# Altium PCB PCB1.PcbDoc (part 2 of 2)
Units mm, origin at the board's own origin, x right, y up, seen from the top; angles counter-clockwise.
Board outline 100.58 x 99.31 mm, 2 copper layers (Top Layer, Bottom Layer); 150 components, 13 nets, 389 pads, 0 vias.
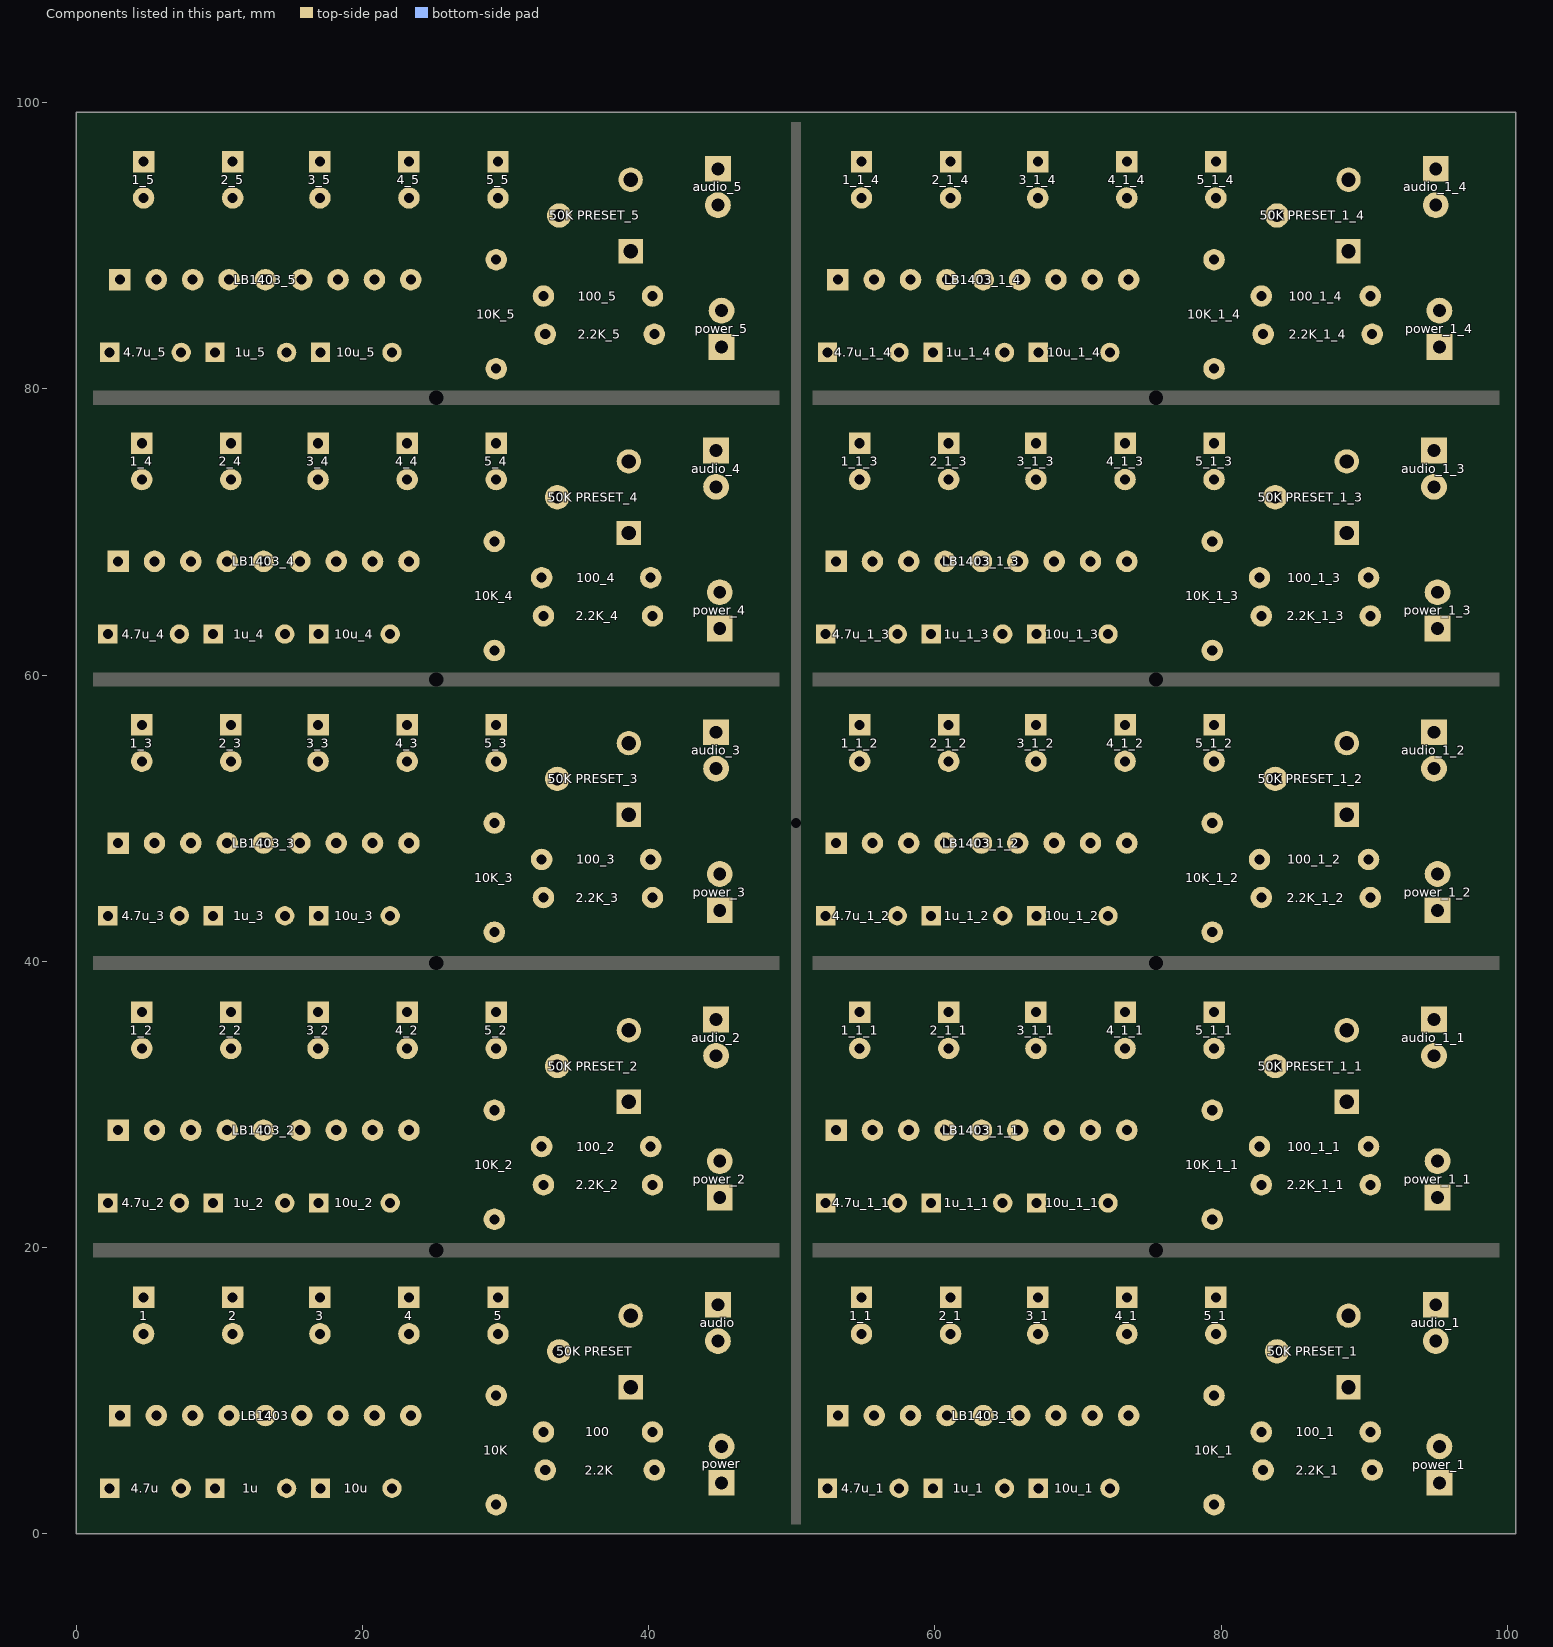
[diagram p2: the components of this part, seen from the top]

## Nets (pads, with @x,y where several pads share a name; then routed paths per layer and width w, separated by ;. In a path a pad name is that pad's centre, name@x,y a point inside that pad or via, vN(x,y) a via of type N, cw(c..) or ccw(c..) an arc to the next point about the centre after c; other vN are vias at no path point) (continued)
copper on no net: | length 3366.2
  Top Layer w0.508: 2.921,28.194 4.572,29.845 4.572,33.909 ; 2.921,48.26 4.572,49.911 4.572,53.975 ; 2.921,67.945 4.572,69.596 4.572,73.66 ; 3.048,87.63 4.699,89.281 4.699,93.345 ; 5.461,28.194 9.627,32.36 9.627,32.741 10.795,33.909 ; 5.461,48.26 9.627,52.426 9.627,52.807 10.795,53.975 ; 5.461,67.945 9.627,72.111 9.627,72.492 10.795,73.66 ; 5.588,87.63 9.754,91.796 9.754,92.177 10.922,93.345 ; 16.891,36.449 18.161,35.179 18.161,30.734 16.891,29.464 16.891,23.154 16.931,23.114 ; 16.891,56.515 18.161,55.245 18.161,50.8 16.891,49.53 16.891,43.22 16.931,43.18 ; 16.891,76.2 18.161,74.93 18.161,70.485 16.891,69.215 16.891,62.905 16.931,62.865 ; 17.018,95.885 18.288,94.615 18.288,90.17 17.018,88.9 17.018,82.59 17.058,82.55 ; 21.931,23.114 23.074,21.971 29.21,21.971 32.385,21.971 38.608,28.194 38.608,30.179 41.83,33.401 44.704,33.401 44.958,33.147 44.958,26.035 ; 21.931,43.18 23.074,42.037 29.21,42.037 32.385,42.037 38.608,48.26 38.608,50.245 41.83,53.467 44.704,53.467 44.958,53.213 44.958,46.101 ; 21.931,62.865 23.074,61.722 29.21,61.722 32.385,61.722 38.608,67.945 38.608,69.93 41.83,73.152 44.704,73.152 44.958,72.898 44.958,65.786 ; 22.058,82.55 23.201,81.407 29.337,81.407 32.512,81.407 38.735,87.63 38.735,89.615 41.957,92.837 44.831,92.837 45.085,92.583 45.085,85.471 ; 23.114,36.449 21.742,35.077 21.742,29.693 23.241,28.194 ; 23.114,56.515 21.742,55.143 21.742,49.759 23.241,48.26 ; 23.114,76.2 21.742,74.828 21.742,69.444 23.241,67.945 ; 23.241,95.885 21.869,94.513 21.869,89.129 23.368,87.63 ; 32.639,24.384 36.957,28.702 36.957,33.528 38.608,35.179 ; 32.639,44.45 36.957,48.768 36.957,53.594 38.608,55.245 ; 32.639,64.135 36.957,68.453 36.957,73.279 38.608,74.93 ; 32.766,83.82 37.084,88.138 37.084,92.964 38.735,94.615 ; 53.086,28.194 54.737,29.845 54.737,33.909 ; 53.086,48.26 54.737,49.911 54.737,53.975 ; 53.086,67.945 54.737,69.596 54.737,73.66 ; 53.213,8.255 54.864,9.906 54.864,13.97 ; 53.213,87.63 54.864,89.281 54.864,93.345 ; 55.626,28.194 59.792,32.36 59.792,32.741 60.96,33.909 ; 55.626,48.26 59.792,52.426 59.792,52.807 60.96,53.975 ; 55.626,67.945 59.792,72.111 59.792,72.492 60.96,73.66 ; 55.753,8.255 59.919,12.421 59.919,12.802 61.087,13.97 ; 55.753,87.63 59.919,91.796 59.919,92.177 61.087,93.345 ; 67.056,36.449 68.326,35.179 68.326,30.734 67.056,29.464 67.056,23.154 67.096,23.114 ; 67.056,56.515 68.326,55.245 68.326,50.8 67.056,49.53 67.056,43.22 67.096,43.18 ; 67.056,76.2 68.326,74.93 68.326,70.485 67.056,69.215 67.056,62.905 67.096,62.865 ; 67.183,16.51 68.453,15.24 68.453,10.795 67.183,9.525 67.183,3.215 67.223,3.175 ; 67.183,95.885 68.453,94.615 68.453,90.17 67.183,88.9 67.183,82.59 67.223,82.55 ; 72.096,23.114 73.239,21.971 79.375,21.971 82.55,21.971 88.773,28.194 88.773,30.179 91.995,33.401 94.869,33.401 95.123,33.147 95.123,26.035 ; 72.096,43.18 73.239,42.037 79.375,42.037 82.55,42.037 88.773,48.26 88.773,50.245 91.995,53.467 94.869,53.467 95.123,53.213 95.123,46.101 ; 72.096,62.865 73.239,61.722 79.375,61.722 82.55,61.722 88.773,67.945 88.773,69.93 91.995,73.152 94.869,73.152 95.123,72.898 95.123,65.786 ; 72.223,3.175 73.366,2.032 79.502,2.032 82.677,2.032 88.9,8.255 88.9,10.24 92.122,13.462 94.996,13.462 95.25,13.208 95.25,6.096 ; 72.223,82.55 73.366,81.407 79.502,81.407 82.677,81.407 88.9,87.63 88.9,89.615 92.122,92.837 94.996,92.837 95.25,92.583 95.25,85.471 ; 73.279,36.449 71.907,35.077 71.907,29.693 73.406,28.194 ; 73.279,56.515 71.907,55.143 71.907,49.759 73.406,48.26 ; 73.279,76.2 71.907,74.828 71.907,69.444 73.406,67.945 ; 73.406,16.51 72.034,15.138 72.034,9.754 73.533,8.255 ; 73.406,95.885 72.034,94.513 72.034,89.129 73.533,87.63 ; 82.804,24.384 87.122,28.702 87.122,33.528 88.773,35.179 ; 82.804,44.45 87.122,48.768 87.122,53.594 88.773,55.245 ; 82.804,64.135 87.122,68.453 87.122,73.279 88.773,74.93 ; 82.931,4.445 87.249,8.763 87.249,13.589 88.9,15.24 ; 82.931,83.82 87.249,88.138 87.249,92.964 88.9,94.615
  Bottom Layer w0.508: 2.199,23.114 4.714,25.629 10.287,25.629 11.811,27.153 11.811,28.956 12.319,29.464 16.891,29.464 18.161,28.194 18.64,28.673 18.64,29.156 20.46,30.976 27.825,30.976 29.21,29.591 ; 2.199,43.18 4.714,45.695 10.287,45.695 11.811,47.219 11.811,49.022 12.319,49.53 16.891,49.53 18.161,48.26 18.64,48.739 18.64,49.222 20.46,51.042 27.825,51.042 29.21,49.657 ; 2.199,62.865 4.714,65.38 10.287,65.38 11.811,66.904 11.811,68.707 12.319,69.215 16.891,69.215 18.161,67.945 18.64,68.424 18.64,68.907 20.46,70.727 27.825,70.727 29.21,69.342 ; 2.326,82.55 4.841,85.065 10.414,85.065 11.938,86.589 11.938,88.392 12.446,88.9 17.018,88.9 18.288,87.63 18.767,88.109 18.767,88.592 20.587,90.412 27.952,90.412 29.337,89.027 ; 4.572,36.449 10.795,36.449 16.891,36.449 23.114,36.449 29.337,36.449 ; 4.572,56.515 10.795,56.515 16.891,56.515 23.114,56.515 29.337,56.515 ; 4.572,76.2 10.795,76.2 16.891,76.2 23.114,76.2 29.337,76.2 ; 4.699,95.885 10.922,95.885 17.018,95.885 23.241,95.885 29.464,95.885 ; 7.199,23.114 9.231,21.082 28.321,21.082 29.21,21.971 ; 7.199,43.18 9.231,41.148 28.321,41.148 29.21,42.037 ; 7.199,62.865 9.231,60.833 28.321,60.833 29.21,61.722 ; 7.326,82.55 9.358,80.518 28.448,80.518 29.337,81.407 ; 8.001,28.194 13.716,33.909 16.891,33.909 ; 8.001,48.26 13.716,53.975 16.891,53.975 ; 8.001,67.945 13.716,73.66 16.891,73.66 ; 8.128,87.63 13.843,93.345 17.018,93.345 ; 9.565,23.114 11.191,24.74 30.707,24.74 31.343,24.104 31.343,23.394 32.131,22.606 38.481,22.606 40.259,24.384 ; 9.565,43.18 11.191,44.806 30.707,44.806 31.343,44.17 31.343,43.46 32.131,42.672 38.481,42.672 40.259,44.45 ; 9.565,62.865 11.191,64.491 30.707,64.491 31.343,63.855 31.343,63.145 32.131,62.357 38.481,62.357 40.259,64.135 ; 9.692,82.55 11.318,84.176 30.834,84.176 31.47,83.54 31.47,82.83 32.258,82.042 38.608,82.042 40.386,83.82 ; 10.541,28.194 10.541,29.337 11.557,30.353 17.78,30.353 21.336,33.909 23.114,33.909 ; 10.541,48.26 10.541,49.403 11.557,50.419 17.78,50.419 21.336,53.975 23.114,53.975 ; 10.541,67.945 10.541,69.088 11.557,70.104 17.78,70.104 21.336,73.66 23.114,73.66 ; 10.668,87.63 10.668,88.773 11.684,89.789 17.907,89.789 21.463,93.345 23.241,93.345 ; 13.081,28.194 15.494,25.781 33.68,25.781 36.5,28.6 42.393,28.6 44.958,26.035 ; 13.081,48.26 15.494,45.847 33.68,45.847 36.5,48.666 42.393,48.666 44.958,46.101 ; 13.081,67.945 15.494,65.532 33.68,65.532 36.5,68.351 42.393,68.351 44.958,65.786 ; 13.208,87.63 15.621,85.217 33.807,85.217 36.627,88.036 42.52,88.036 45.085,85.471 ; 14.565,23.114 15.759,21.92 24.232,21.92 25.679,23.368 29.921,23.368 30.48,22.809 30.48,21.717 30.988,21.209 47.371,21.209 47.371,33.274 44.704,35.941 ; 14.565,43.18 15.759,41.986 24.232,41.986 25.679,43.434 29.921,43.434 30.48,42.875 30.48,41.783 30.988,41.275 47.371,41.275 47.371,53.34 44.704,56.007 ; 14.565,62.865 15.759,61.671 24.232,61.671 25.679,63.119 29.921,63.119 30.48,62.56 30.48,61.468 30.988,60.96 47.371,60.96 47.371,73.025 44.704,75.692 ; 14.692,82.55 15.886,81.356 24.359,81.356 25.806,82.804 30.048,82.804 30.607,82.245 30.607,81.153 31.115,80.645 47.498,80.645 47.498,92.71 44.831,95.377 ; 15.621,28.194 17.018,26.797 18.935,26.797 19.443,27.305 19.443,28.715 20.942,30.214 26.171,30.214 28.052,28.333 29.731,28.333 30.468,29.07 30.468,30.112 30.429,30.151 30.429,32.817 29.337,33.909 ; 15.621,48.26 17.018,46.863 18.935,46.863 19.443,47.371 19.443,48.781 20.942,50.28 26.171,50.28 28.052,48.399 29.731,48.399 30.468,49.136 30.468,50.178 30.429,50.217 30.429,52.883 29.337,53.975 ; 15.621,67.945 17.018,66.548 18.935,66.548 19.443,67.056 19.443,68.466 20.942,69.965 26.171,69.965 28.052,68.084 29.731,68.084 30.468,68.821 30.468,69.863 30.429,69.902 30.429,72.568 29.337,73.66 ; 15.748,87.63 17.145,86.233 19.062,86.233 19.57,86.741 19.57,88.151 21.069,89.65 26.298,89.65 28.179,87.769 29.858,87.769 30.595,88.506 30.595,89.548 30.556,89.587 30.556,92.253 29.464,93.345 ; 20.701,28.194 21.959,29.452 25.409,29.452 27.29,27.571 30.047,27.571 30.097,27.621 30.876,27.621 33.608,30.353 33.608,32.679 ; 20.701,48.26 21.959,49.518 25.409,49.518 27.29,47.637 30.047,47.637 30.097,47.687 30.876,47.687 33.608,50.419 33.608,52.745 ; 20.701,67.945 21.959,69.203 25.409,69.203 27.29,67.322 30.047,67.322 30.097,67.372 30.876,67.372 33.608,70.104 33.608,72.43 ; 20.828,87.63 22.086,88.888 25.536,88.888 27.417,87.007 30.174,87.007 30.224,87.057 31.003,87.057 33.735,89.789 33.735,92.115 ; 23.241,28.194 24.626,26.809 30.362,26.809 30.412,26.859 31.865,26.859 31.865,27.051 32.512,27.051 ; 23.241,48.26 24.626,46.875 30.362,46.875 30.412,46.925 31.865,46.925 31.865,47.117 32.512,47.117 ; 23.241,67.945 24.626,66.56 30.362,66.56 30.412,66.61 31.865,66.61 31.865,66.802 32.512,66.802 ; 23.368,87.63 24.753,86.245 30.489,86.245 30.539,86.295 31.992,86.295 31.992,86.487 32.639,86.487 ; 40.132,27.051 43.688,23.495 44.958,23.495 ; 40.132,47.117 43.688,43.561 44.958,43.561 ; 40.132,66.802 43.688,63.246 44.958,63.246 ; 40.259,86.487 43.815,82.931 45.085,82.931 ; 52.364,23.114 54.879,25.629 60.452,25.629 61.976,27.153 61.976,28.956 62.484,29.464 67.056,29.464 68.326,28.194 68.805,28.673 68.805,29.156 70.625,30.976 77.99,30.976 79.375,29.591 ; 52.364,43.18 54.879,45.695 60.452,45.695 61.976,47.219 61.976,49.022 62.484,49.53 67.056,49.53 68.326,48.26 68.805,48.739 68.805,49.222 70.625,51.042 77.99,51.042 79.375,49.657 ; 52.364,62.865 54.879,65.38 60.452,65.38 61.976,66.904 61.976,68.707 62.484,69.215 67.056,69.215 68.326,67.945 68.805,68.424 68.805,68.907 70.625,70.727 77.99,70.727 79.375,69.342 ; 52.491,3.175 55.006,5.69 60.579,5.69 62.103,7.214 62.103,9.017 62.611,9.525 67.183,9.525 68.453,8.255 68.932,8.734 68.932,9.217 70.752,11.037 78.117,11.037 79.502,9.652 ; 52.491,82.55 55.006,85.065 60.579,85.065 62.103,86.589 62.103,88.392 62.611,88.9 67.183,88.9 68.453,87.63 68.932,88.109 68.932,88.592 70.752,90.412 78.117,90.412 79.502,89.027 ; 54.737,36.449 60.96,36.449 67.056,36.449 73.279,36.449 79.502,36.449 ; 54.737,56.515 60.96,56.515 67.056,56.515 73.279,56.515 79.502,56.515 ; 54.737,76.2 60.96,76.2 67.056,76.2 73.279,76.2 79.502,76.2 ; 54.864,16.51 61.087,16.51 67.183,16.51 73.406,16.51 79.629,16.51 ; 54.864,95.885 61.087,95.885 67.183,95.885 73.406,95.885 79.629,95.885 ; 57.364,23.114 59.396,21.082 78.486,21.082 79.375,21.971 ; 57.364,43.18 59.396,41.148 78.486,41.148 79.375,42.037 ; 57.364,62.865 59.396,60.833 78.486,60.833 79.375,61.722 ; 57.491,3.175 59.523,1.143 78.613,1.143 79.502,2.032 ; 57.491,82.55 59.523,80.518 78.613,80.518 79.502,81.407 ; 58.166,28.194 63.881,33.909 67.056,33.909 ; 58.166,48.26 63.881,53.975 67.056,53.975 ; 58.166,67.945 63.881,73.66 67.056,73.66 ; 58.293,8.255 64.008,13.97 67.183,13.97 ; 58.293,87.63 64.008,93.345 67.183,93.345 ; 59.73,23.114 61.356,24.74 80.872,24.74 81.508,24.104 81.508,23.394 82.296,22.606 88.646,22.606 90.424,24.384 ; 59.73,43.18 61.356,44.806 80.872,44.806 81.508,44.17 81.508,43.46 82.296,42.672 88.646,42.672 90.424,44.45 ; 59.73,62.865 61.356,64.491 80.872,64.491 81.508,63.855 81.508,63.145 82.296,62.357 88.646,62.357 90.424,64.135 ; 59.857,3.175 61.483,4.801 80.999,4.801 81.635,4.165 81.635,3.455 82.423,2.667 88.773,2.667 90.551,4.445 ; 59.857,82.55 61.483,84.176 80.999,84.176 81.635,83.54 81.635,82.83 82.423,82.042 88.773,82.042 90.551,83.82 ; 60.706,28.194 60.706,29.337 61.722,30.353 67.945,30.353 71.501,33.909 73.279,33.909 ; 60.706,48.26 60.706,49.403 61.722,50.419 67.945,50.419 71.501,53.975 73.279,53.975 ; 60.706,67.945 60.706,69.088 61.722,70.104 67.945,70.104 71.501,73.66 73.279,73.66 ; 60.833,8.255 60.833,9.398 61.849,10.414 68.072,10.414 71.628,13.97 73.406,13.97 ; 60.833,87.63 60.833,88.773 61.849,89.789 68.072,89.789 71.628,93.345 73.406,93.345 ; 63.246,28.194 65.659,25.781 83.845,25.781 86.665,28.6 92.558,28.6 95.123,26.035 ; 63.246,48.26 65.659,45.847 83.845,45.847 86.665,48.666 92.558,48.666 95.123,46.101 ; 63.246,67.945 65.659,65.532 83.845,65.532 86.665,68.351 92.558,68.351 95.123,65.786 ; 63.373,8.255 65.786,5.842 83.972,5.842 86.792,8.661 92.685,8.661 95.25,6.096 ; 63.373,87.63 65.786,85.217 83.972,85.217 86.792,88.036 92.685,88.036 95.25,85.471 ; 64.73,23.114 65.924,21.92 74.397,21.92 75.844,23.368 80.086,23.368 80.645,22.809 80.645,21.717 81.153,21.209 97.536,21.209 97.536,33.274 94.869,35.941 ; 64.73,43.18 65.924,41.986 74.397,41.986 75.844,43.434 80.086,43.434 80.645,42.875 80.645,41.783 81.153,41.275 97.536,41.275 97.536,53.34 94.869,56.007 ; 64.73,62.865 65.924,61.671 74.397,61.671 75.844,63.119 80.086,63.119 80.645,62.56 80.645,61.468 81.153,60.96 97.536,60.96 97.536,73.025 94.869,75.692 ; 64.857,3.175 66.051,1.981 74.524,1.981 75.971,3.429 80.213,3.429 80.772,2.87 80.772,1.778 81.28,1.27 97.663,1.27 97.663,13.335 94.996,16.002 ; 64.857,82.55 66.051,81.356 74.524,81.356 75.971,82.804 80.213,82.804 80.772,82.245 80.772,81.153 81.28,80.645 97.663,80.645 97.663,92.71 94.996,95.377 ; 65.786,28.194 67.183,26.797 69.1,26.797 69.608,27.305 69.608,28.715 71.107,30.214 76.336,30.214 78.217,28.333 79.896,28.333 80.633,29.07 80.633,30.112 80.594,30.151 80.594,32.817 79.502,33.909 ; 65.786,48.26 67.183,46.863 69.1,46.863 69.608,47.371 69.608,48.781 71.107,50.28 76.336,50.28 78.217,48.399 79.896,48.399 80.633,49.136 80.633,50.178 80.594,50.217 80.594,52.883 79.502,53.975 ; 65.786,67.945 67.183,66.548 69.1,66.548 69.608,67.056 69.608,68.466 71.107,69.965 76.336,69.965 78.217,68.084 79.896,68.084 80.633,68.821 80.633,69.863 80.594,69.902 80.594,72.568 79.502,73.66 ; 65.913,8.255 67.31,6.858 69.227,6.858 69.735,7.366 69.735,8.776 71.234,10.275 76.463,10.275 78.344,8.394 80.023,8.394 80.76,9.131 80.76,10.173 80.721,10.212 80.721,12.878 79.629,13.97 ; 65.913,87.63 67.31,86.233 69.227,86.233 69.735,86.741 69.735,88.151 71.234,89.65 76.463,89.65 78.344,87.769 80.023,87.769 80.76,88.506 80.76,89.548 80.721,89.587 80.721,92.253 79.629,93.345 ; 70.866,28.194 72.124,29.452 75.574,29.452 77.455,27.571 80.212,27.571 80.262,27.621 81.041,27.621 83.773,30.353 83.773,32.679 ; 70.866,48.26 72.124,49.518 75.574,49.518 77.455,47.637 80.212,47.637 80.262,47.687 81.041,47.687 83.773,50.419 83.773,52.745 ; 70.866,67.945 72.124,69.203 75.574,69.203 77.455,67.322 80.212,67.322 80.262,67.372 81.041,67.372 83.773,70.104 83.773,72.43 ; 70.993,8.255 72.251,9.513 75.701,9.513 77.582,7.632 80.339,7.632 80.389,7.682 81.168,7.682 83.9,10.414 83.9,12.74 ; 70.993,87.63 72.251,88.888 75.701,88.888 77.582,87.007 80.339,87.007 80.389,87.057 81.168,87.057 83.9,89.789 83.9,92.115 ; 73.406,28.194 74.791,26.809 80.527,26.809 80.577,26.859 82.03,26.859 82.03,27.051 82.677,27.051 ; 73.406,48.26 74.791,46.875 80.527,46.875 80.577,46.925 82.03,46.925 82.03,47.117 82.677,47.117 ; 73.406,67.945 74.791,66.56 80.527,66.56 80.577,66.61 82.03,66.61 82.03,66.802 82.677,66.802 ; 73.533,8.255 74.918,6.87 80.654,6.87 80.704,6.92 82.157,6.92 82.157,7.112 82.804,7.112 ; 73.533,87.63 74.918,86.245 80.654,86.245 80.704,86.295 82.157,86.295 82.157,86.487 82.804,86.487 ; 90.297,27.051 93.853,23.495 95.123,23.495 ; 90.297,47.117 93.853,43.561 95.123,43.561 ; 90.297,66.802 93.853,63.246 95.123,63.246 ; 90.424,7.112 93.98,3.556 95.25,3.556 ; 90.424,86.487 93.98,82.931 95.25,82.931

## Keep-outs
Keep-Out Layer:
  the board outline again, w0.254

## Silkscreen, mask and mechanical layers (free items; w line width, h text height)
Top Overlay:
  lines w0.254: 2.794,31.242 1.016,29.464 ; 2.794,51.308 1.016,49.53 ; 2.794,70.993 1.016,69.215 ; 2.921,11.303 1.143,9.525 ; 2.921,90.678 1.143,88.9 ; 52.959,31.242 51.181,29.464 ; 52.959,51.308 51.181,49.53 ; 52.959,70.993 51.181,69.215 ; 53.086,11.303 51.308,9.525 ; 53.086,90.678 51.308,88.9 ; 1.016,29.464 1.016,25.781 25.019,25.781 25.019,31.115 25.019,31.623 24.765,31.623 3.175,31.623 1.016,29.464 ; 1.016,49.53 1.016,45.847 25.019,45.847 25.019,51.181 25.019,51.689 24.765,51.689 3.175,51.689 1.016,49.53 ; 1.016,69.215 1.016,65.532 25.019,65.532 25.019,70.866 25.019,71.374 24.765,71.374 3.175,71.374 1.016,69.215 ; 1.143,9.525 3.302,11.684 24.892,11.684 25.146,11.684 25.146,11.176 25.146,5.842 1.143,5.842 1.143,9.525 ; 1.143,88.9 1.143,85.217 25.146,85.217 25.146,90.551 25.146,91.059 24.892,91.059 3.302,91.059 1.143,88.9 ; 51.181,29.464 53.34,31.623 74.93,31.623 75.184,31.623 75.184,31.115 75.184,25.781 51.181,25.781 51.181,29.464 ; 51.181,49.53 53.34,51.689 74.93,51.689 75.184,51.689 75.184,51.181 75.184,45.847 51.181,45.847 51.181,49.53 ; 51.181,69.215 53.34,71.374 74.93,71.374 75.184,71.374 75.184,70.866 75.184,65.532 51.181,65.532 51.181,69.215 ; 51.308,9.525 51.308,5.842 75.311,5.842 75.311,11.176 75.311,11.684 75.057,11.684 53.467,11.684 51.308,9.525 ; 51.308,88.9 53.467,91.059 75.057,91.059 75.311,91.059 75.311,90.551 75.311,85.217 51.308,85.217 51.308,88.9 ; 0.508,20.574 0.508,38.989 49.657,38.989 49.657,20.574 0.508,20.574 ; 0.508,40.64 0.508,59.055 49.657,59.055 49.657,40.64 0.508,40.64 ; 0.508,60.325 0.508,78.74 49.657,78.74 49.657,60.325 0.508,60.325 ; 0.635,0.635 49.784,0.635 49.784,19.05 0.635,19.05 0.635,0.635 ; 0.635,80.01 0.635,98.425 49.784,98.425 49.784,80.01 0.635,80.01 ; 50.673,20.574 99.822,20.574 99.822,38.989 50.673,38.989 50.673,20.574 ; 50.673,40.64 99.822,40.64 99.822,59.055 50.673,59.055 50.673,40.64 ; 50.673,60.325 99.822,60.325 99.822,78.74 50.673,78.74 50.673,60.325 ; 50.8,0.635 50.8,19.05 99.949,19.05 99.949,0.635 50.8,0.635 ; 50.8,80.01 99.949,80.01 99.949,98.425 50.8,98.425 50.8,80.01
  text "AUDIO" at 46.863,97.663 h1.52 r270
  text "AUDIO" at 97.028,97.663 h1.52 r270
  text "SIGNAL" at 41.656,97.028 h0.8
  text "SIGNAL" at 91.821,97.028 h0.8
  text "AI PCB" at 32.385,96.266 h1.52
  text "AI PCB" at 82.55,96.266 h1.52
  text "+" at 2.794,94.996 h1
  text "+" at 9.017,94.996 h1
  text "+" at 15.113,94.996 h1
  text "+" at 21.336,94.996 h1
  text "+" at 27.559,94.996 h1
  text "+" at 52.959,94.996 h1
  text "+" at 59.182,94.996 h1
  text "+" at 65.278,94.996 h1
  text "+" at 71.501,94.996 h1
  text "+" at 77.724,94.996 h1
  text "-" at 2.921,92.837 h1
  text "-" at 9.144,92.837 h1
  text "-" at 15.24,92.837 h1
  text "-" at 21.463,92.837 h1
  text "-" at 27.686,92.837 h1
  text "-" at 53.086,92.837 h1
  text "-" at 59.309,92.837 h1
  text "-" at 65.405,92.837 h1
  text "-" at 71.628,92.837 h1
  text "-" at 77.851,92.837 h1
  text "50K" at 35.052,91.313 h1.5
  text "50K" at 85.217,91.313 h1.5
  text "GND" at 42.672,90.17 h1
  text "GND" at 92.837,90.17 h1
  text "LB1403" at 8.255,89.408 h1.2
  text "LB1403" at 58.42,89.408 h1.2
  text "POWER" at 47.117,88.011 h1.52 r270
  text "POWER" at 97.282,88.011 h1.52 r270
  text "12V" at 42.926,87.122 h1.52
  text "12V" at 92.964,87.122 h1.52
  text "10K" at 28.829,86.614 h1 r270
  text "10K" at 78.994,86.614 h1 r270
  text "100" at 35.179,85.979 h1
  text "100" at 85.344,85.979 h1
  text "-" at 42.418,85.344 h1
  text "-" at 92.583,85.344 h1
  text "2.2K" at 34.925,83.312 h1
  text "2.2K" at 85.09,83.312 h1
  text "+" at 42.545,82.677 h1
  text "+" at 92.71,82.677 h1
  text "4.7u" at 3.175,82.169 h0.9
  text "4.7u" at 53.34,82.169 h0.9
  text "1u" at 11.557,82.042 h1.2
  text "10u" at 18.415,82.042 h1
  text "1u" at 61.722,82.042 h1.2
  text "10u" at 68.58,82.042 h1
  text "VU METER" at 31.115,80.772 h1.52
  text "VU METER" at 81.28,80.772 h1.52
  text "-" at 6.985,80.645 h1
  text "-" at 14.478,80.645 h1
  text "-" at 21.717,80.645 h1
  text "-" at 57.15,80.645 h1
  text "-" at 64.643,80.645 h1
  text "-" at 71.882,80.645 h1
  text "+" at 1.905,80.518 h1
  text "+" at 9.398,80.518 h1
  text "+" at 16.764,80.518 h1
  text "+" at 52.07,80.518 h1
  text "+" at 59.563,80.518 h1
  text "+" at 66.929,80.518 h1
  text "AUDIO" at 46.736,77.978 h1.52 r270
  text "AUDIO" at 96.901,77.978 h1.52 r270
  text "SIGNAL" at 41.529,77.343 h0.8
  text "SIGNAL" at 91.694,77.343 h0.8
  text "AI PCB" at 32.258,76.581 h1.52
  text "AI PCB" at 82.423,76.581 h1.52
  text "+" at 2.667,75.311 h1
  text "+" at 8.89,75.311 h1
  text "+" at 14.986,75.311 h1
  text "+" at 21.209,75.311 h1
  text "+" at 27.432,75.311 h1
  text "+" at 52.832,75.311 h1
  text "+" at 59.055,75.311 h1
  text "+" at 65.151,75.311 h1
  text "+" at 71.374,75.311 h1
  text "+" at 77.597,75.311 h1
  text "-" at 2.794,73.152 h1
  text "-" at 9.017,73.152 h1
  text "-" at 15.113,73.152 h1
  text "-" at 21.336,73.152 h1
  text "-" at 27.559,73.152 h1
  text "-" at 52.959,73.152 h1
  text "-" at 59.182,73.152 h1
  text "-" at 65.278,73.152 h1
  text "-" at 71.501,73.152 h1
  text "-" at 77.724,73.152 h1
  text "50K" at 34.925,71.628 h1.5
  text "50K" at 85.09,71.628 h1.5
  text "GND" at 42.545,70.485 h1
  text "GND" at 92.71,70.485 h1
  text "LB1403" at 8.128,69.723 h1.2
  text "LB1403" at 58.293,69.723 h1.2
  text "POWER" at 46.99,68.326 h1.52 r270
  text "POWER" at 97.155,68.326 h1.52 r270
  text "12V" at 42.799,67.437 h1.52
  text "12V" at 92.964,67.437 h1.52
  text "10K" at 28.702,66.929 h1 r270
  text "10K" at 78.867,66.929 h1 r270
  text "100" at 35.052,66.294 h1
  text "100" at 85.217,66.294 h1
  text "-" at 42.291,65.659 h1
  text "-" at 92.456,65.659 h1
  text "2.2K" at 34.798,63.627 h1
  text "2.2K" at 84.963,63.627 h1
  text "+" at 42.418,62.992 h1
  text "+" at 92.583,62.992 h1
  text "4.7u" at 3.048,62.484 h0.9
  text "4.7u" at 53.213,62.484 h0.9
  text "1u" at 11.43,62.357 h1.2
  text "10u" at 18.288,62.357 h1
  text "1u" at 61.595,62.357 h1.2
  text "10u" at 68.453,62.357 h1
  text "VU METER" at 30.988,61.087 h1.52
  text "VU METER" at 81.153,61.087 h1.52
  text "-" at 6.858,60.96 h1
  text "-" at 14.351,60.96 h1
  text "-" at 21.59,60.96 h1
  text "-" at 57.023,60.96 h1
  text "-" at 64.516,60.96 h1
  text "-" at 71.755,60.96 h1
  text "+" at 1.778,60.833 h1
  text "+" at 9.271,60.833 h1
  text "+" at 16.637,60.833 h1
  text "+" at 51.943,60.833 h1
  text "+" at 59.436,60.833 h1
  text "+" at 66.802,60.833 h1
  text "AUDIO" at 46.736,58.293 h1.52 r270
  text "AUDIO" at 96.901,58.293 h1.52 r270
  text "SIGNAL" at 41.529,57.658 h0.8
  text "SIGNAL" at 91.694,57.658 h0.8
  text "AI PCB" at 32.258,56.896 h1.52
  text "AI PCB" at 82.423,56.896 h1.52
  text "+" at 2.667,55.626 h1
  text "+" at 8.89,55.626 h1
  text "+" at 14.986,55.626 h1
  text "+" at 21.209,55.626 h1
  text "+" at 27.432,55.626 h1
  text "+" at 52.832,55.626 h1
  text "+" at 59.055,55.626 h1
  text "+" at 65.151,55.626 h1
  text "+" at 71.374,55.626 h1
  text "+" at 77.597,55.626 h1
  text "-" at 2.794,53.467 h1
  text "-" at 9.017,53.467 h1
  text "-" at 15.113,53.467 h1
  text "-" at 21.336,53.467 h1
  text "-" at 27.559,53.467 h1
  text "-" at 52.959,53.467 h1
  text "-" at 59.182,53.467 h1
  text "-" at 65.278,53.467 h1
  text "-" at 71.501,53.467 h1
  text "-" at 77.724,53.467 h1
  text "50K" at 34.925,51.943 h1.5
  text "50K" at 85.09,51.943 h1.5
  text "GND" at 42.545,50.8 h1
  text "GND" at 92.71,50.8 h1
  text "LB1403" at 8.128,50.038 h1.2
  text "LB1403" at 58.293,50.038 h1.2
  text "POWER" at 46.99,48.641 h1.52 r270
  text "POWER" at 97.155,48.641 h1.52 r270
  text "12V" at 92.964,47.879 h1.52
  text "12V" at 42.799,47.752 h1.52
  text "10K" at 28.702,47.244 h1 r270
  text "10K" at 78.867,47.244 h1 r270
  text "100" at 35.052,46.609 h1
  text "100" at 85.217,46.609 h1
  text "-" at 42.291,45.974 h1
  text "-" at 92.456,45.974 h1
  text "2.2K" at 34.798,43.942 h1
  text "2.2K" at 84.963,43.942 h1
  text "+" at 42.418,43.307 h1
  text "+" at 92.583,43.307 h1
  text "4.7u" at 3.048,42.799 h0.9
  text "4.7u" at 53.213,42.799 h0.9
  text "1u" at 11.43,42.672 h1.2
  text "10u" at 18.288,42.672 h1
  text "1u" at 61.595,42.672 h1.2
  text "10u" at 68.453,42.672 h1
  text "VU METER" at 30.988,41.402 h1.52
  text "VU METER" at 81.153,41.402 h1.52
  text "-" at 6.858,41.275 h1
  text "-" at 14.351,41.275 h1
  text "-" at 21.59,41.275 h1
  text "-" at 57.023,41.275 h1
  text "-" at 64.516,41.275 h1
  text "-" at 71.755,41.275 h1
  text "+" at 1.778,41.148 h1
  text "+" at 9.271,41.148 h1
  text "+" at 16.637,41.148 h1
  text "+" at 51.943,41.148 h1
  text "+" at 59.436,41.148 h1
  text "+" at 66.802,41.148 h1
  text "AUDIO" at 46.736,38.227 h1.52 r270
  text "AUDIO" at 96.901,38.227 h1.52 r270
  text "SIGNAL" at 41.529,37.592 h0.8
  text "SIGNAL" at 91.694,37.592 h0.8
  text "AI PCB" at 32.258,36.83 h1.52
  text "AI PCB" at 82.423,36.83 h1.52
  text "+" at 2.667,35.56 h1
  text "+" at 8.89,35.56 h1
  text "+" at 14.986,35.56 h1
  text "+" at 21.209,35.56 h1
  text "+" at 27.432,35.56 h1
  text "+" at 52.832,35.56 h1
  text "+" at 59.055,35.56 h1
  text "+" at 65.151,35.56 h1
  text "+" at 71.374,35.56 h1
  text "+" at 77.597,35.56 h1
  text "-" at 2.794,33.401 h1
  text "-" at 9.017,33.401 h1
  text "-" at 15.113,33.401 h1
  text "-" at 21.336,33.401 h1
  text "-" at 27.559,33.401 h1
  text "-" at 52.959,33.401 h1
  text "-" at 59.182,33.401 h1
  text "-" at 65.278,33.401 h1
  text "-" at 71.501,33.401 h1
  text "-" at 77.724,33.401 h1
  text "50K" at 34.925,31.877 h1.5
  text "50K" at 85.09,31.877 h1.5
  text "GND" at 42.545,30.734 h1
  text "GND" at 92.71,30.734 h1
  text "LB1403" at 8.128,29.972 h1.2
  text "LB1403" at 58.293,29.972 h1.2
  text "POWER" at 46.99,28.575 h1.52 r270
  text "POWER" at 97.155,28.575 h1.52 r270
  text "12V" at 42.799,27.686 h1.52
  text "12V" at 92.964,27.686 h1.52
  text "10K" at 28.702,27.178 h1 r270
  text "10K" at 78.867,27.178 h1 r270
  text "100" at 35.052,26.543 h1
  text "100" at 85.217,26.543 h1
  text "-" at 42.291,25.908 h1
  text "-" at 92.456,25.908 h1
  text "2.2K" at 34.798,23.876 h1
  text "2.2K" at 84.963,23.876 h1
  text "+" at 42.418,23.241 h1
  text "+" at 92.583,23.241 h1
  text "4.7u" at 3.048,22.733 h0.9
  text "4.7u" at 53.213,22.733 h0.9
  text "1u" at 11.43,22.606 h1.2
  text "10u" at 18.288,22.606 h1
  text "1u" at 61.595,22.606 h1.2
  text "10u" at 68.453,22.606 h1
  text "VU METER" at 30.988,21.336 h1.52
  text "VU METER" at 81.153,21.336 h1.52
  text "-" at 6.858,21.209 h1
  text "-" at 14.351,21.209 h1
  text "-" at 21.59,21.209 h1
  text "-" at 57.023,21.209 h1
  text "-" at 64.516,21.209 h1
  text "-" at 71.755,21.209 h1
  text "+" at 1.778,21.082 h1
  text "+" at 9.271,21.082 h1
  text "+" at 16.637,21.082 h1
  text "+" at 51.943,21.082 h1
  text "+" at 59.436,21.082 h1
  text "+" at 66.802,21.082 h1
  text "AUDIO" at 46.863,18.288 h1.52 r270
  text "AUDIO" at 97.028,18.288 h1.52 r270
  text "SIGNAL" at 41.656,17.653 h0.8
  text "SIGNAL" at 91.821,17.653 h0.8
  text "AI PCB" at 32.385,16.891 h1.52
  text "AI PCB" at 82.55,16.891 h1.52
  text "+" at 2.794,15.621 h1
  text "+" at 9.017,15.621 h1
  text "+" at 15.113,15.621 h1
  text "+" at 21.336,15.621 h1
  text "+" at 27.559,15.621 h1
  text "+" at 52.959,15.621 h1
  text "+" at 59.182,15.621 h1
  text "+" at 65.278,15.621 h1
  text "+" at 71.501,15.621 h1
  text "+" at 77.724,15.621 h1
  text "-" at 2.921,13.462 h1
  text "-" at 9.144,13.462 h1
  text "-" at 15.24,13.462 h1
  text "-" at 21.463,13.462 h1
  text "-" at 27.686,13.462 h1
  text "-" at 53.086,13.462 h1
  text "-" at 59.309,13.462 h1
  text "-" at 65.405,13.462 h1
  text "-" at 71.628,13.462 h1
  text "-" at 77.851,13.462 h1
  text "50K" at 35.052,11.938 h1.5
  text "50K" at 85.217,11.938 h1.5
  text "GND" at 42.672,10.795 h1
  text "GND" at 92.837,10.795 h1
  text "LB1403" at 8.255,10.033 h1.2
  text "LB1403" at 58.42,10.033 h1.2
  text "POWER" at 47.117,8.636 h1.52 r270
  text "POWER" at 97.282,8.636 h1.52 r270
  text "12V" at 42.799,7.747 h1.52
  text "12V" at 92.964,7.747 h1.52
  text "10K" at 28.829,7.239 h1 r270
  text "10K" at 78.994,7.239 h1 r270
  text "100" at 35.179,6.604 h1
  text "100" at 85.344,6.604 h1
  text "-" at 42.418,5.969 h1
  text "-" at 92.583,5.969 h1
  text "2.2K" at 34.925,3.937 h1
  text "2.2K" at 85.09,3.937 h1
  text "+" at 42.545,3.302 h1
  text "+" at 92.71,3.302 h1
  text "4.7u" at 3.175,2.794 h0.9
  text "4.7u" at 53.34,2.794 h0.9
  text "1u" at 11.557,2.667 h1.2
  text "10u" at 18.415,2.667 h1
  text "1u" at 61.722,2.667 h1.2
  text "10u" at 68.58,2.667 h1
  text "VU METER" at 31.115,1.397 h1.52
  text "VU METER" at 81.28,1.397 h1.52
  text "-" at 6.985,1.27 h1
  text "-" at 14.478,1.27 h1
  text "-" at 21.717,1.27 h1
  text "-" at 57.15,1.27 h1
  text "-" at 64.643,1.27 h1
  text "-" at 71.882,1.27 h1
  text "+" at 1.905,1.143 h1
  text "+" at 9.398,1.143 h1
  text "+" at 16.764,1.143 h1
  text "+" at 52.07,1.143 h1
  text "+" at 59.563,1.143 h1
  text "+" at 66.929,1.143 h1
Bottom Overlay:
  text "AI PCB" at 40.767,96.266 h1.52
  text "AI PCB" at 90.932,96.266 h1.52
  text "VU METER" at 42.799,80.772 h1.52
  text "VU METER" at 92.964,80.772 h1.52
  text "AI PCB" at 40.64,76.581 h1.52
  text "AI PCB" at 90.805,76.581 h1.52
  text "VU METER" at 42.672,61.087 h1.52
  text "VU METER" at 92.837,61.087 h1.52
  text "AI PCB" at 40.64,56.896 h1.52
  text "AI PCB" at 90.805,56.896 h1.52
  text "VU METER" at 42.672,41.402 h1.52
  text "VU METER" at 92.837,41.402 h1.52
  text "AI PCB" at 40.64,36.83 h1.52
  text "AI PCB" at 90.805,36.83 h1.52
  text "VU METER" at 42.672,21.336 h1.52
  text "VU METER" at 92.837,21.336 h1.52
  text "AI PCB" at 40.767,16.891 h1.52
  text "AI PCB" at 90.932,16.891 h1.52
  text "VU METER" at 42.799,1.397 h1.52
  text "VU METER" at 92.964,1.397 h1.52